# EAGLE board qfn_board (EAGLE 7.4.0)

Size 100 x 100 mm. Coordinates in mm from the lower left corner, seen from the top.
Outline: 0,0 100,0 100,100 0,100 0,0
Copper layers used: 

## Footprints (pad centres in the part's own frame; a part is rotated, then mirrored left to right if it is on the bottom)
QFN8 = smd 0.6 x 0.25: 1 -2.3,-0.25; 2 -2.3,0.25; 5 2.3,0.25; 6 2.3,-0.25 | smd 0.25 x 0.6: 3 -0.25,-2.3; 4 0.25,-2.3; 7 0.25,2.3; 8 -0.25,2.3

## Placement (x,y rotation side)
U1  [QFN8]  50,50 0 top

## Library data of the parts
U1 = synth